# EAGLE board psu_rail_2_multi (EAGLE 7.4.0)
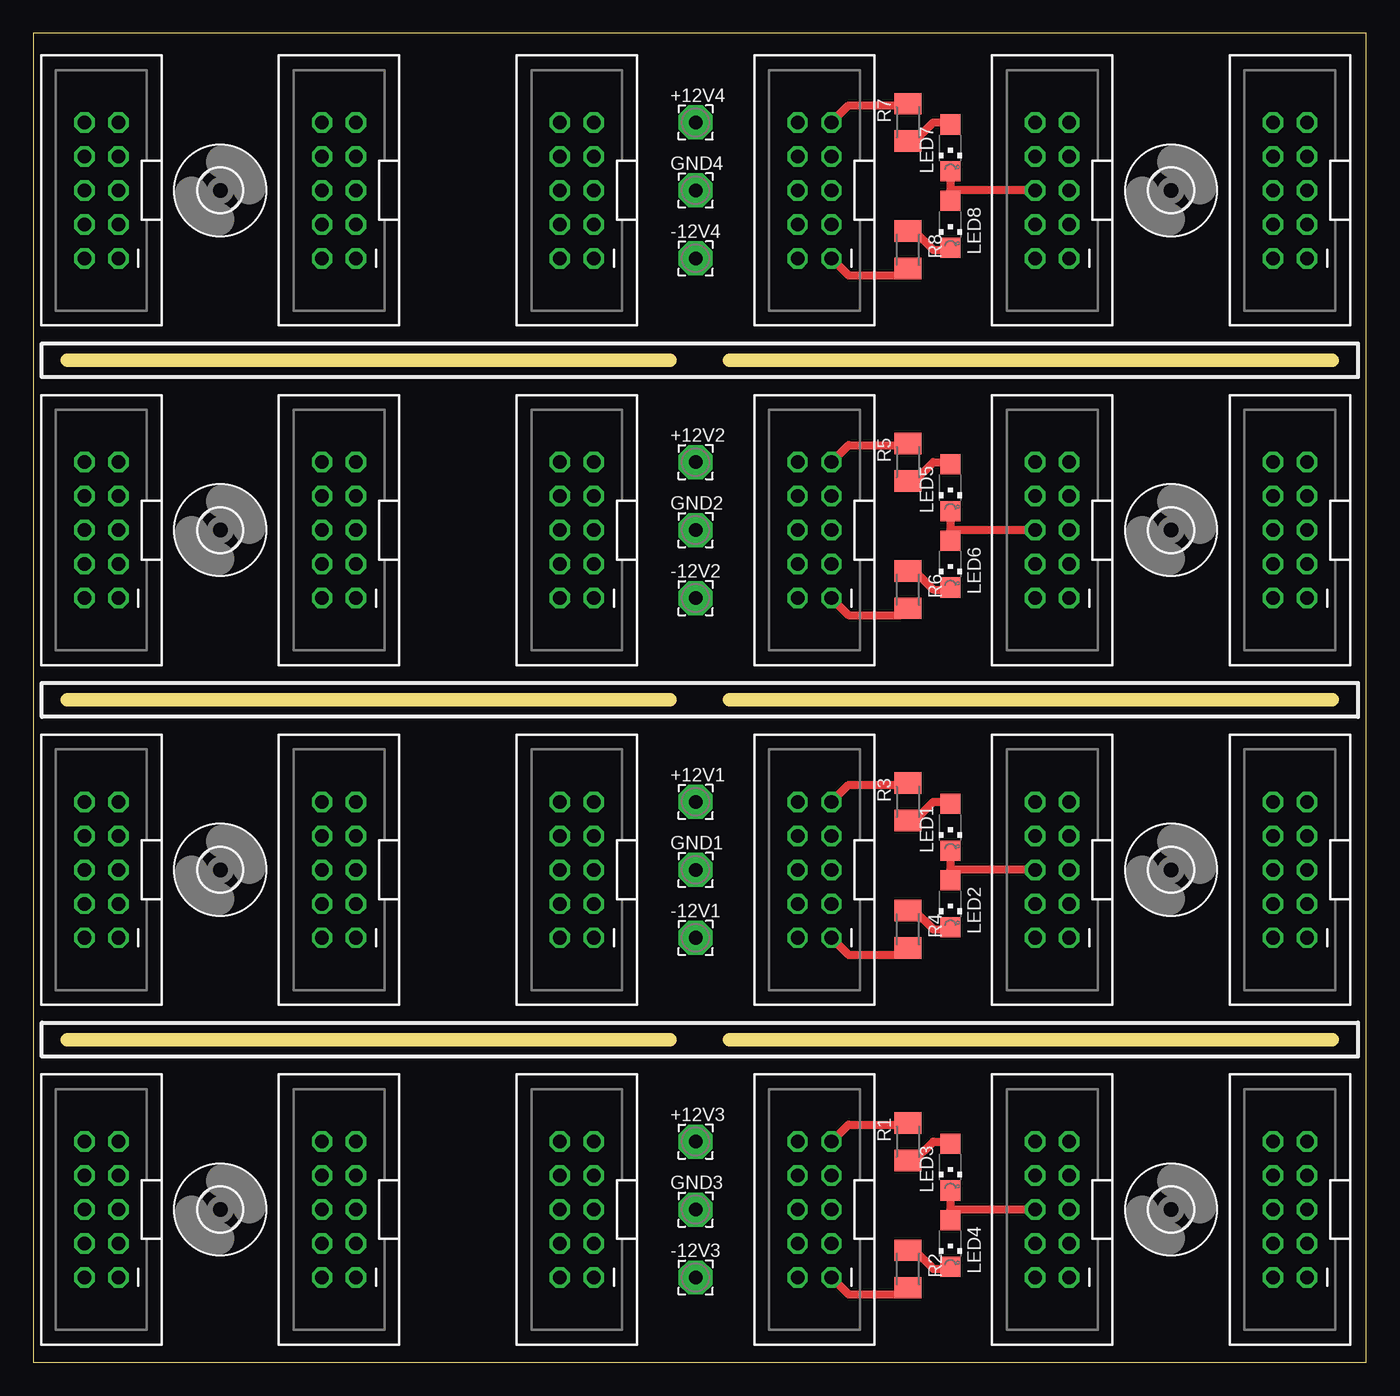
[diagram p0: board, top side]
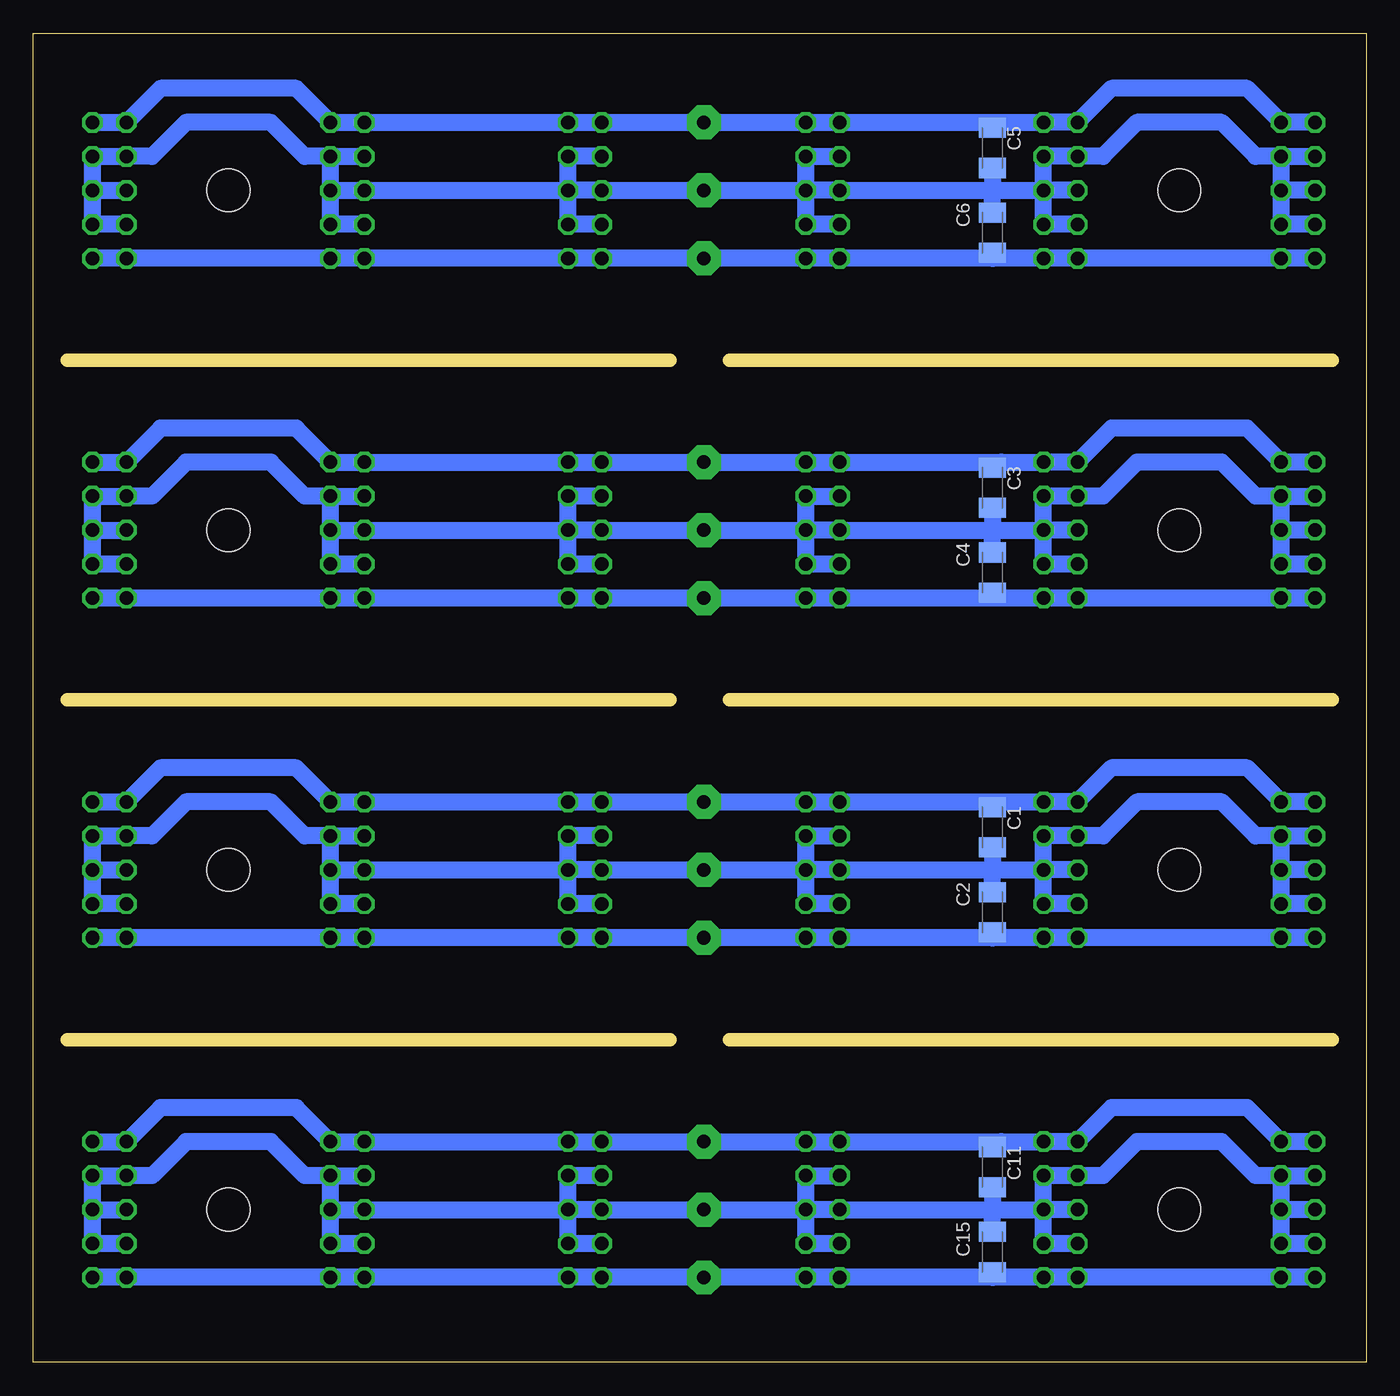
[diagram p1: board, bottom side, seen from below]

Size 99.67 x 99.36 mm. Coordinates in mm from the lower left corner, seen from the top.
Outline: 0,0 99.67,0 99.67,99.36 0,99.36 0,0
Copper layers (1*16): Top 0.035mm / dielectric 1.5mm / Bottom 0.035mm
Design rules "default": minimum track width 10mil, minimum drill 24mil, track to track 8mil, track to pad 8mil, pad to pad 8mil, via to via 8mil, smd to smd 8mil, copper to edge 40mil, drill to drill 8mil, minimum pad ring 10mil, minimum via ring 8mil, stop-mask expansion 4mil, vias tented up to drill 0mil, thermal gap 10mil
Milling: 6 lines

## Footprints (pad centres in the part's own frame; a part is rotated, then mirrored left to right if it is on the bottom)
2,54/1,0 = drill 1.016 pad 2.54 octagon: 1 0,0
C1206K = smd 1.5 x 2: 1 -1.5,0; 2 1.5,0
2X5-SHROUDED = drill 1.016 octagon: 1 -1.27,5.08; 2 1.27,5.08; 3 -1.27,2.54; 4 1.27,2.54; 5 -1.27,0; 6 1.27,0; 7 -1.27,-2.54; 8 1.27,-2.54; 9 -1.27,-5.08; 10 1.27,-5.08
CHIPLED_1206 = smd 1.5 x 1.5: A 0,-1.75; C 0,1.75
M1206 = smd 1.6 x 2: 1 -1.4,0; 2 1.4,0
3,2 = hole 3.2: 0,0

## Placement (x,y rotation side)
+12V1  [2,54/1,0]  49.53,41.91 0 top
+12V2  [2,54/1,0]  49.53,67.31 0 top
+12V3  [2,54/1,0]  49.53,16.51 0 top
+12V4  [2,54/1,0]  49.53,92.71 0 top
-12V1  [2,54/1,0]  49.53,31.75 0 top
-12V2  [2,54/1,0]  49.53,57.15 0 top
-12V3  [2,54/1,0]  49.53,6.35 0 top
-12V4  [2,54/1,0]  49.53,82.55 0 top
C1  100n  [C1206K]  27.94,40.01 270 bottom
C2  100n  [C1206K]  27.94,33.66 270 bottom
C3  100n  [C1206K]  27.94,65.41 270 bottom
C4  100n  [C1206K]  27.94,59.05 270 bottom
C5  100n  [C1206K]  27.94,90.81 270 bottom
C6  100n  [C1206K]  27.94,84.45 270 bottom
C11  100n  [C1206K]  27.94,14.61 270 bottom
C15  100n  [C1206K]  27.94,8.26 270 bottom
GND1  [2,54/1,0]  49.53,36.83 0 top
GND2  [2,54/1,0]  49.53,62.23 0 top
GND3  [2,54/1,0]  49.53,11.43 0 top
GND4  [2,54/1,0]  49.53,87.63 0 top
JP1  M05X2SHD  [2X5-SHROUDED]  5.08,11.43 180 top
JP2  M05X2SHD  [2X5-SHROUDED]  22.86,11.43 180 top
JP3  M05X2SHD  [2X5-SHROUDED]  40.64,11.43 180 top
JP4  M05X2SHD  [2X5-SHROUDED]  93.98,11.43 180 top
JP5  M05X2SHD  [2X5-SHROUDED]  76.2,11.43 180 top
JP6  M05X2SHD  [2X5-SHROUDED]  58.42,11.43 180 top
JP7  M05X2SHD  [2X5-SHROUDED]  5.08,36.83 180 top
JP8  M05X2SHD  [2X5-SHROUDED]  22.86,36.83 180 top
JP9  M05X2SHD  [2X5-SHROUDED]  40.64,36.83 180 top
JP10  M05X2SHD  [2X5-SHROUDED]  93.98,36.83 180 top
JP11  M05X2SHD  [2X5-SHROUDED]  76.2,36.83 180 top
JP12  M05X2SHD  [2X5-SHROUDED]  58.42,36.83 180 top
JP13  M05X2SHD  [2X5-SHROUDED]  5.08,62.23 180 top
JP14  M05X2SHD  [2X5-SHROUDED]  22.86,62.23 180 top
JP15  M05X2SHD  [2X5-SHROUDED]  40.64,62.23 180 top
JP16  M05X2SHD  [2X5-SHROUDED]  93.98,62.23 180 top
JP17  M05X2SHD  [2X5-SHROUDED]  76.2,62.23 180 top
JP18  M05X2SHD  [2X5-SHROUDED]  58.42,62.23 180 top
JP19  M05X2SHD  [2X5-SHROUDED]  5.08,87.63 180 top
JP20  M05X2SHD  [2X5-SHROUDED]  22.86,87.63 180 top
JP21  M05X2SHD  [2X5-SHROUDED]  40.64,87.63 180 top
JP22  M05X2SHD  [2X5-SHROUDED]  93.98,87.63 180 top
JP23  M05X2SHD  [2X5-SHROUDED]  76.2,87.63 180 top
JP24  M05X2SHD  [2X5-SHROUDED]  58.42,87.63 180 top
LED1  [CHIPLED_1206]  68.58,40.01 180 top
LED2  [CHIPLED_1206]  68.58,34.29 180 top
LED3  [CHIPLED_1206]  68.58,14.61 180 top
LED4  [CHIPLED_1206]  68.58,8.89 180 top
LED5  [CHIPLED_1206]  68.58,65.41 180 top
LED6  [CHIPLED_1206]  68.58,59.69 180 top
LED7  [CHIPLED_1206]  68.58,90.81 180 top
LED8  [CHIPLED_1206]  68.58,85.09 180 top
R1  [M1206]  65.41,16.51 90 top
R2  [M1206]  65.41,6.99 270 top
R3  [M1206]  65.41,41.91 90 top
R4  [M1206]  65.41,32.38 270 top
R5  [M1206]  65.41,67.31 90 top
R6  [M1206]  65.41,57.78 270 top
R7  [M1206]  65.41,92.71 90 top
R8  [M1206]  65.41,83.19 270 top
U$1  [3,2]  13.97,11.43 0 top
U$2  [3,2]  85.09,11.43 0 top
U$3  [3,2]  13.97,36.83 0 top
U$4  [3,2]  85.09,36.83 0 top
U$5  [3,2]  13.97,62.23 0 top
U$6  [3,2]  85.09,62.23 0 top
U$7  [3,2]  13.97,87.63 0 top
U$8  [3,2]  85.09,87.63 0 top

## Library data of the parts
+12V1-+12V4 -12V1--12V4 GND1-GND4 = wirepad
C1-C6 C11 C15 R1-R8 = rcl
JP1-JP24 = SparkFun
LED1-LED8 = led
U$1-U$8 = holes

## Nets
+12V: +12V3.1 C11.1 JP1.9 JP1.10 JP2.9 JP2.10 JP3.9 JP3.10 JP4.9 JP4.10 JP5.9 JP5.10 JP6.9 JP6.10 R1.2
+12V1: +12V1.1 C1.1 JP7.9 JP7.10 JP8.9 JP8.10 JP9.9 JP9.10 JP10.9 JP10.10 JP11.9 JP11.10 JP12.9 JP12.10 R3.2
+12V2: +12V2.1 C3.1 JP13.9 JP13.10 JP14.9 JP14.10 JP15.9 JP15.10 JP16.9 JP16.10 JP17.9 JP17.10 JP18.9 JP18.10 R5.2
+12V3: +12V4.1 C5.1 JP19.9 JP19.10 JP20.9 JP20.10 JP21.9 JP21.10 JP22.9 JP22.10 JP23.9 JP23.10 JP24.9 JP24.10 R7.2
-12V: -12V3.1 C15.2 JP1.1 JP1.2 JP2.1 JP2.2 JP3.1 JP3.2 JP4.1 JP4.2 JP5.1 JP5.2 JP6.1 JP6.2 R2.2
-12V1: -12V1.1 C2.2 JP7.1 JP7.2 JP8.1 JP8.2 JP9.1 JP9.2 JP10.1 JP10.2 JP11.1 JP11.2 JP12.1 JP12.2 R4.2
-12V2: -12V2.1 C4.2 JP13.1 JP13.2 JP14.1 JP14.2 JP15.1 JP15.2 JP16.1 JP16.2 JP17.1 JP17.2 JP18.1 JP18.2 R6.2
-12V3: -12V4.1 C6.2 JP19.1 JP19.2 JP20.1 JP20.2 JP21.1 JP21.2 JP22.1 JP22.2 JP23.1 JP23.2 JP24.1 JP24.2 R8.2
GND: C11.2 C15.1 GND3.1 JP1.3 JP1.4 JP1.5 JP1.6 JP1.7 JP1.8 JP2.3 JP2.4 JP2.5 JP2.6 JP2.7 JP2.8 JP3.3 JP3.4 JP3.5 JP3.6 JP3.7 JP3.8 JP4.3 JP4.4 JP4.5 JP4.6 JP4.7 JP4.8 JP5.3 JP5.4 JP5.5 JP5.6 JP5.7 JP5.8 JP6.3 JP6.4 JP6.5 JP6.6 JP6.7 JP6.8 LED3.C LED4.A
GND1: C1.2 C2.1 GND1.1 JP7.3 JP7.4 JP7.5 JP7.6 JP7.7 JP7.8 JP8.3 JP8.4 JP8.5 JP8.6 JP8.7 JP8.8 JP9.3 JP9.4 JP9.5 JP9.6 JP9.7 JP9.8 JP10.3 JP10.4 JP10.5 JP10.6 JP10.7 JP10.8 JP11.3 JP11.4 JP11.5 JP11.6 JP11.7 JP11.8 JP12.3 JP12.4 JP12.5 JP12.6 JP12.7 JP12.8 LED1.C LED2.A
GND2: C3.2 C4.1 GND2.1 JP13.3 JP13.4 JP13.5 JP13.6 JP13.7 JP13.8 JP14.3 JP14.4 JP14.5 JP14.6 JP14.7 JP14.8 JP15.3 JP15.4 JP15.5 JP15.6 JP15.7 JP15.8 JP16.3 JP16.4 JP16.5 JP16.6 JP16.7 JP16.8 JP17.3 JP17.4 JP17.5 JP17.6 JP17.7 JP17.8 JP18.3 JP18.4 JP18.5 JP18.6 JP18.7 JP18.8 LED5.C LED6.A
GND3: C5.2 C6.1 GND4.1 JP19.3 JP19.4 JP19.5 JP19.6 JP19.7 JP19.8 JP20.3 JP20.4 JP20.5 JP20.6 JP20.7 JP20.8 JP21.3 JP21.4 JP21.5 JP21.6 JP21.7 JP21.8 JP22.3 JP22.4 JP22.5 JP22.6 JP22.7 JP22.8 JP23.3 JP23.4 JP23.5 JP23.6 JP23.7 JP23.8 JP24.3 JP24.4 JP24.5 JP24.6 JP24.7 JP24.8 LED7.C LED8.A
N$1: LED4.C R2.1
N$2: LED3.A R1.1
N$3: LED2.C R4.1
N$4: LED1.A R3.1
N$5: LED6.C R6.1
N$6: LED5.A R5.1
N$7: LED8.C R8.1
N$8: LED7.A R7.1

## Tracks (layer width: path | path; a pad name or v marks a point on that pad's centre or on a via)
+12V
  Top 0.61: JP6.9 60.96,17.78 65.28,17.78 R1.2
  Bottom 1.27: JP4.9 JP4.10 90.17,19.05 80.01,19.05 JP5.9 JP5.10 JP6.9 JP6.10 +12V3.1 JP3.9 JP3.10 27.3,16.51 | 27.3,16.51 JP2.9 JP2.10 19.05,19.05 8.89,19.05 JP1.9 JP1.10 | C11.1 27.71,16.11 27.3,16.51
+12V1
  Top 0.61: JP12.9 60.96,43.18 65.28,43.18 R3.2
  Bottom 1.27: JP10.9 JP10.10 90.17,44.45 80.01,44.45 JP11.9 JP11.10 JP12.9 JP12.10 +12V1.1 JP9.9 JP9.10 27.3,41.91 | 27.3,41.91 JP8.9 JP8.10 19.05,44.45 8.89,44.45 JP7.9 JP7.10 | C1.1 27.71,41.51 27.3,41.91
+12V2
  Top 0.61: JP18.9 60.96,68.58 65.28,68.58 R5.2
  Bottom 1.27: JP16.9 JP16.10 90.17,69.85 80.01,69.85 JP17.9 JP17.10 JP18.9 JP18.10 +12V2.1 JP15.9 JP15.10 27.3,67.31 | 27.3,67.31 JP14.9 JP14.10 19.05,69.85 8.89,69.85 JP13.9 JP13.10 | C3.1 27.71,66.91 27.3,67.31
+12V3
  Top 0.61: JP24.9 60.96,93.98 65.28,93.98 R7.2
  Bottom 1.27: JP22.9 JP22.10 90.17,95.25 80.01,95.25 JP23.9 JP23.10 JP24.9 JP24.10 +12V4.1 JP21.9 JP21.10 27.3,92.71 | 27.3,92.71 JP20.9 JP20.10 19.05,95.25 8.89,95.25 JP19.9 JP19.10 | C5.1 27.71,92.31 27.3,92.71
-12V
  Top 0.61: JP6.1 60.96,5.08 64.9,5.08 R2.2
  Bottom 1.27: JP1.2 JP1.1 JP2.2 JP2.1 27.94,6.35 | 27.94,6.35 JP3.2 JP3.1 -12V3.1 JP6.2 JP6.1 JP5.2 JP5.1 JP4.2 JP4.1 | C15.2 27.94,6.35
-12V1
  Top 0.61: JP12.1 60.96,30.48 64.9,30.48 R4.2
  Bottom 1.27: JP7.2 JP7.1 JP8.2 JP8.1 27.94,31.75 | 27.94,31.75 JP9.2 JP9.1 -12V1.1 JP12.2 JP12.1 JP11.2 JP11.1 JP10.2 JP10.1 | C2.2 27.94,31.75
-12V2
  Top 0.61: JP18.1 60.96,55.88 64.9,55.88 R6.2
  Bottom 1.27: JP13.2 JP13.1 JP14.2 JP14.1 27.94,57.15 | 27.94,57.15 JP15.2 JP15.1 -12V2.1 JP18.2 JP18.1 JP17.2 JP17.1 JP16.2 JP16.1 | C4.2 27.94,57.15
-12V3
  Top 0.61: JP24.1 60.96,81.28 64.9,81.28 R8.2
  Bottom 1.27: JP19.2 JP19.1 JP20.2 JP20.1 27.94,82.55 | 27.94,82.55 JP21.2 JP21.1 -12V4.1 JP24.2 JP24.1 JP23.2 JP23.1 JP22.2 JP22.1 | C6.2 27.94,82.55
GND
  Top 0.61: LED3.C 68.58,11.43 | 68.58,11.43 LED4.A | JP5.6 68.58,11.43
  Bottom 1.27: JP4.5 JP4.3 JP4.4 | JP4.5 JP4.7 JP4.8 90.81,13.97 88.27,16.51 81.92,16.51 79.38,13.97 JP5.7 | JP4.5 JP4.6 | JP5.4 JP5.3 JP5.5 | JP5.5 JP5.6 JP6.5 | JP5.7 JP5.5 | JP6.8 JP6.7 JP6.5 | JP6.5 JP6.6 GND3.1 JP3.5 | JP6.4 JP6.3 JP6.5 | JP3.4 JP3.3 JP3.5 | JP3.8 JP3.7 JP3.5 | 27.94,11.43 JP3.6 JP3.5 | 27.94,11.43 JP2.5 | JP2.4 JP2.3 JP2.5 | JP2.5 JP2.7 JP2.8 19.68,13.97 17.14,16.51 10.79,16.51 8.26,13.97 JP1.7 | JP2.6 JP2.5 | C15.1 27.94,11.43 | C11.2 27.94,11.43 | JP1.5 JP1.3 JP1.4 | JP1.5 JP1.7 | JP1.7 JP1.8 | JP1.6 JP1.5 | JP5.7 JP5.8
GND1
  Top 0.61: LED1.C 68.58,36.83 | 68.58,36.83 LED2.A | JP11.6 68.58,36.83
  Bottom 1.27: JP10.5 JP10.3 JP10.4 | JP10.5 JP10.7 JP10.8 90.81,39.37 88.27,41.91 81.92,41.91 79.38,39.37 JP11.7 | JP10.5 JP10.6 | JP11.4 JP11.3 JP11.5 | JP11.5 JP11.6 JP12.5 | JP11.7 JP11.5 | JP12.8 JP12.7 JP12.5 | JP12.5 JP12.6 GND1.1 JP9.5 | JP12.4 JP12.3 JP12.5 | JP9.4 JP9.3 JP9.5 | JP9.8 JP9.7 JP9.5 | 27.94,36.83 JP9.6 JP9.5 | 27.94,36.83 JP8.5 | JP8.4 JP8.3 JP8.5 | JP8.5 JP8.7 JP8.8 19.68,39.37 17.14,41.91 10.79,41.91 8.26,39.37 JP7.7 | JP8.6 JP8.5 | C2.1 27.94,36.83 | C1.2 27.94,36.83 | JP7.5 JP7.3 JP7.4 | JP7.5 JP7.7 | JP7.7 JP7.8 | JP7.6 JP7.5 | JP11.7 JP11.8
GND2
  Top 0.61: LED5.C 68.58,62.23 | 68.58,62.23 LED6.A | JP17.6 68.58,62.23
  Bottom 1.27: JP16.5 JP16.3 JP16.4 | JP16.5 JP16.7 JP16.8 90.81,64.77 88.27,67.31 81.92,67.31 79.38,64.77 JP17.7 | JP16.5 JP16.6 | JP17.4 JP17.3 JP17.5 | JP17.5 JP17.6 JP18.5 | JP17.7 JP17.5 | JP18.8 JP18.7 JP18.5 | JP18.5 JP18.6 GND2.1 JP15.5 | JP18.4 JP18.3 JP18.5 | JP15.4 JP15.3 JP15.5 | JP15.8 JP15.7 JP15.5 | 27.94,62.23 JP15.6 JP15.5 | 27.94,62.23 JP14.5 | JP14.4 JP14.3 JP14.5 | JP14.5 JP14.7 JP14.8 19.68,64.77 17.14,67.31 10.79,67.31 8.26,64.77 JP13.7 | JP14.6 JP14.5 | C4.1 27.94,62.23 | C3.2 27.94,62.23 | JP13.5 JP13.3 JP13.4 | JP13.5 JP13.7 | JP13.7 JP13.8 | JP13.6 JP13.5 | JP17.7 JP17.8
GND3
  Top 0.61: LED7.C 68.58,87.63 | 68.58,87.63 LED8.A | JP23.6 68.58,87.63
  Bottom 1.27: JP22.5 JP22.3 JP22.4 | JP22.5 JP22.7 JP22.8 90.81,90.17 88.27,92.71 81.92,92.71 79.38,90.17 JP23.7 | JP22.5 JP22.6 | JP23.4 JP23.3 JP23.5 | JP23.5 JP23.6 JP24.5 | JP23.7 JP23.5 | JP24.8 JP24.7 JP24.5 | JP24.5 JP24.6 GND4.1 JP21.5 | JP24.4 JP24.3 JP24.5 | JP21.4 JP21.3 JP21.5 | JP21.8 JP21.7 JP21.5 | 27.94,87.63 JP21.6 JP21.5 | 27.94,87.63 JP20.5 | JP20.4 JP20.3 JP20.5 | JP20.5 JP20.7 JP20.8 19.68,90.17 17.14,92.71 10.79,92.71 8.26,90.17 JP19.7 | JP20.6 JP20.5 | C6.1 27.94,87.63 | C5.2 27.94,87.63 | JP19.5 JP19.3 JP19.4 | JP19.5 JP19.7 | JP19.7 JP19.8 | JP19.6 JP19.5 | JP23.7 JP23.8
N$1
  Top 0.61: R2.1 65.91,8.38 67.31,6.99 68.42,6.99 LED4.C
N$2
  Top 0.61: R1.1 65.91,15.11 67.31,16.51 68.42,16.51 LED3.A
N$3
  Top 0.61: R4.1 65.91,33.78 67.31,32.38 68.42,32.38 LED2.C
N$4
  Top 0.61: R3.1 65.91,40.51 67.31,41.91 68.42,41.91 LED1.A
N$5
  Top 0.61: R6.1 65.91,59.19 67.31,57.78 68.42,57.78 LED6.C
N$6
  Top 0.61: R5.1 65.91,65.91 67.31,67.31 68.42,67.31 LED5.A
N$7
  Top 0.61: R8.1 65.91,84.58 67.31,83.19 68.42,83.19 LED8.C
N$8
  Top 0.61: R7.1 65.91,91.31 67.31,92.71 68.42,92.71 LED7.A